# Altium PCB Power_Test.PcbDoc
Units mil, origin at the board's own origin, x right, y up, seen from the top; angles counter-clockwise.
Board outline 2960 x 2470 mil, 4 copper layers (Top Layer 1, Top Layer, Bottom Layer, Bottom Layer 1), stack 23.756 mil thick; 37 components, 22 nets, 174 pads, 476 vias.
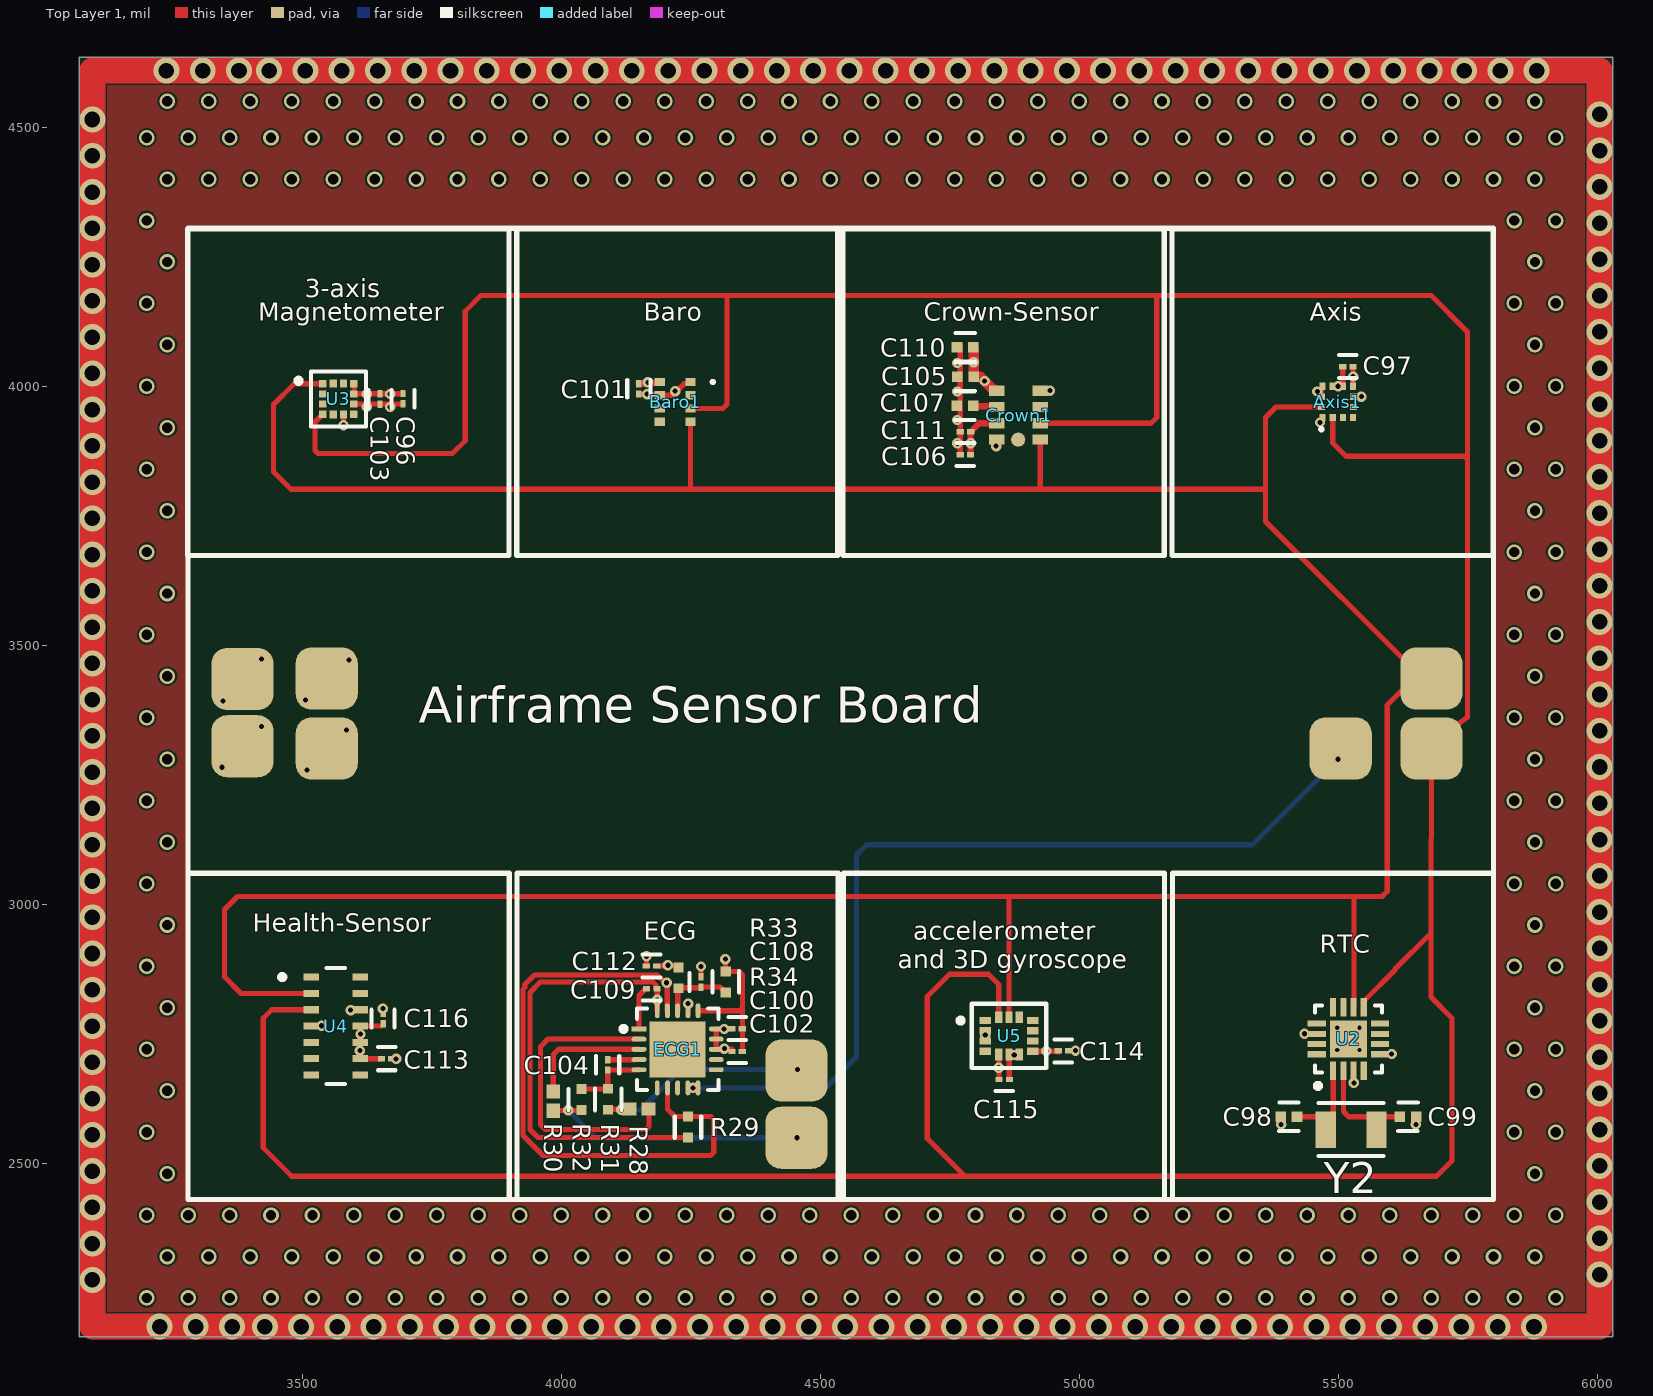
[diagram p0: Top Layer 1 view]
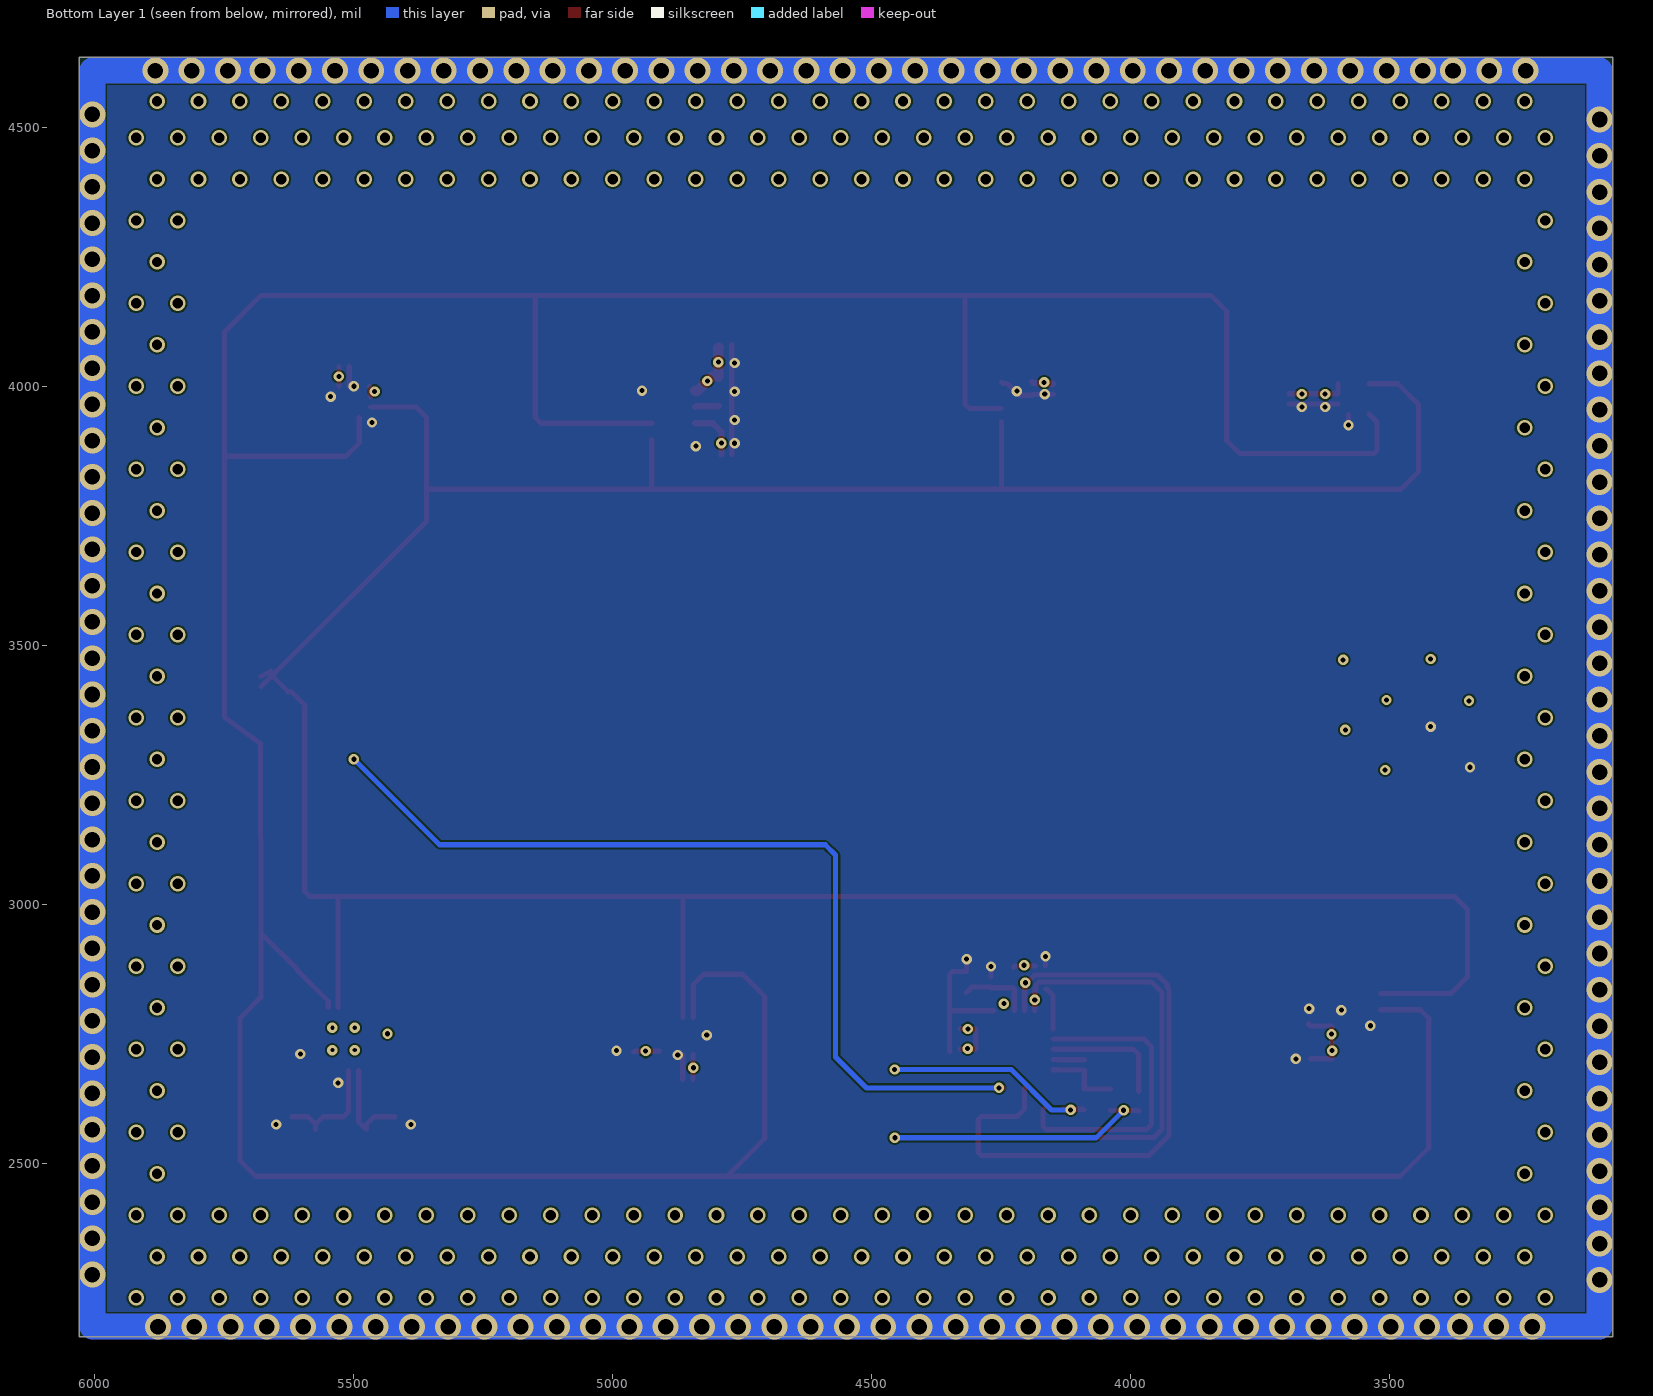
[diagram p1: Bottom Layer 1 view, seen from below]
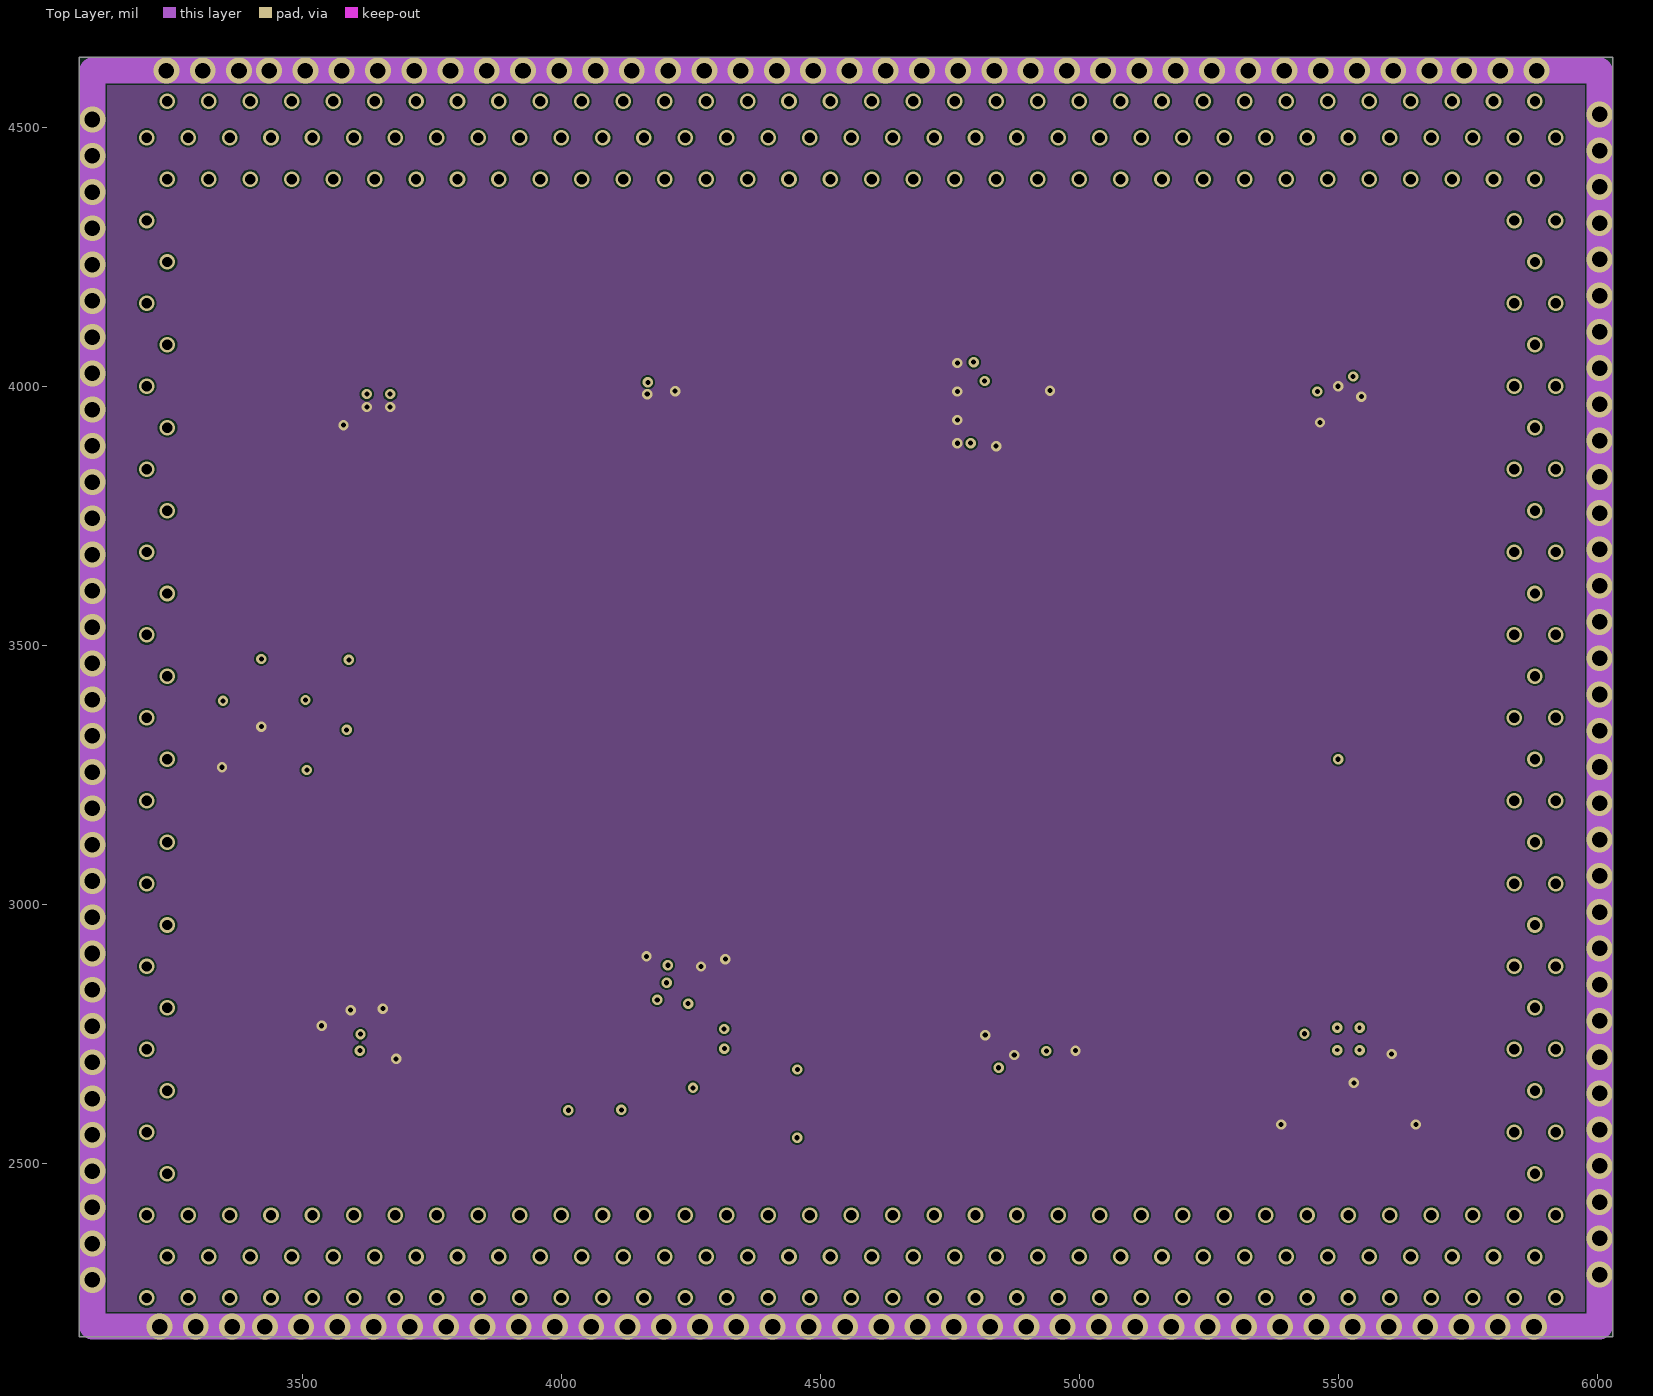
[diagram p2: Top Layer]
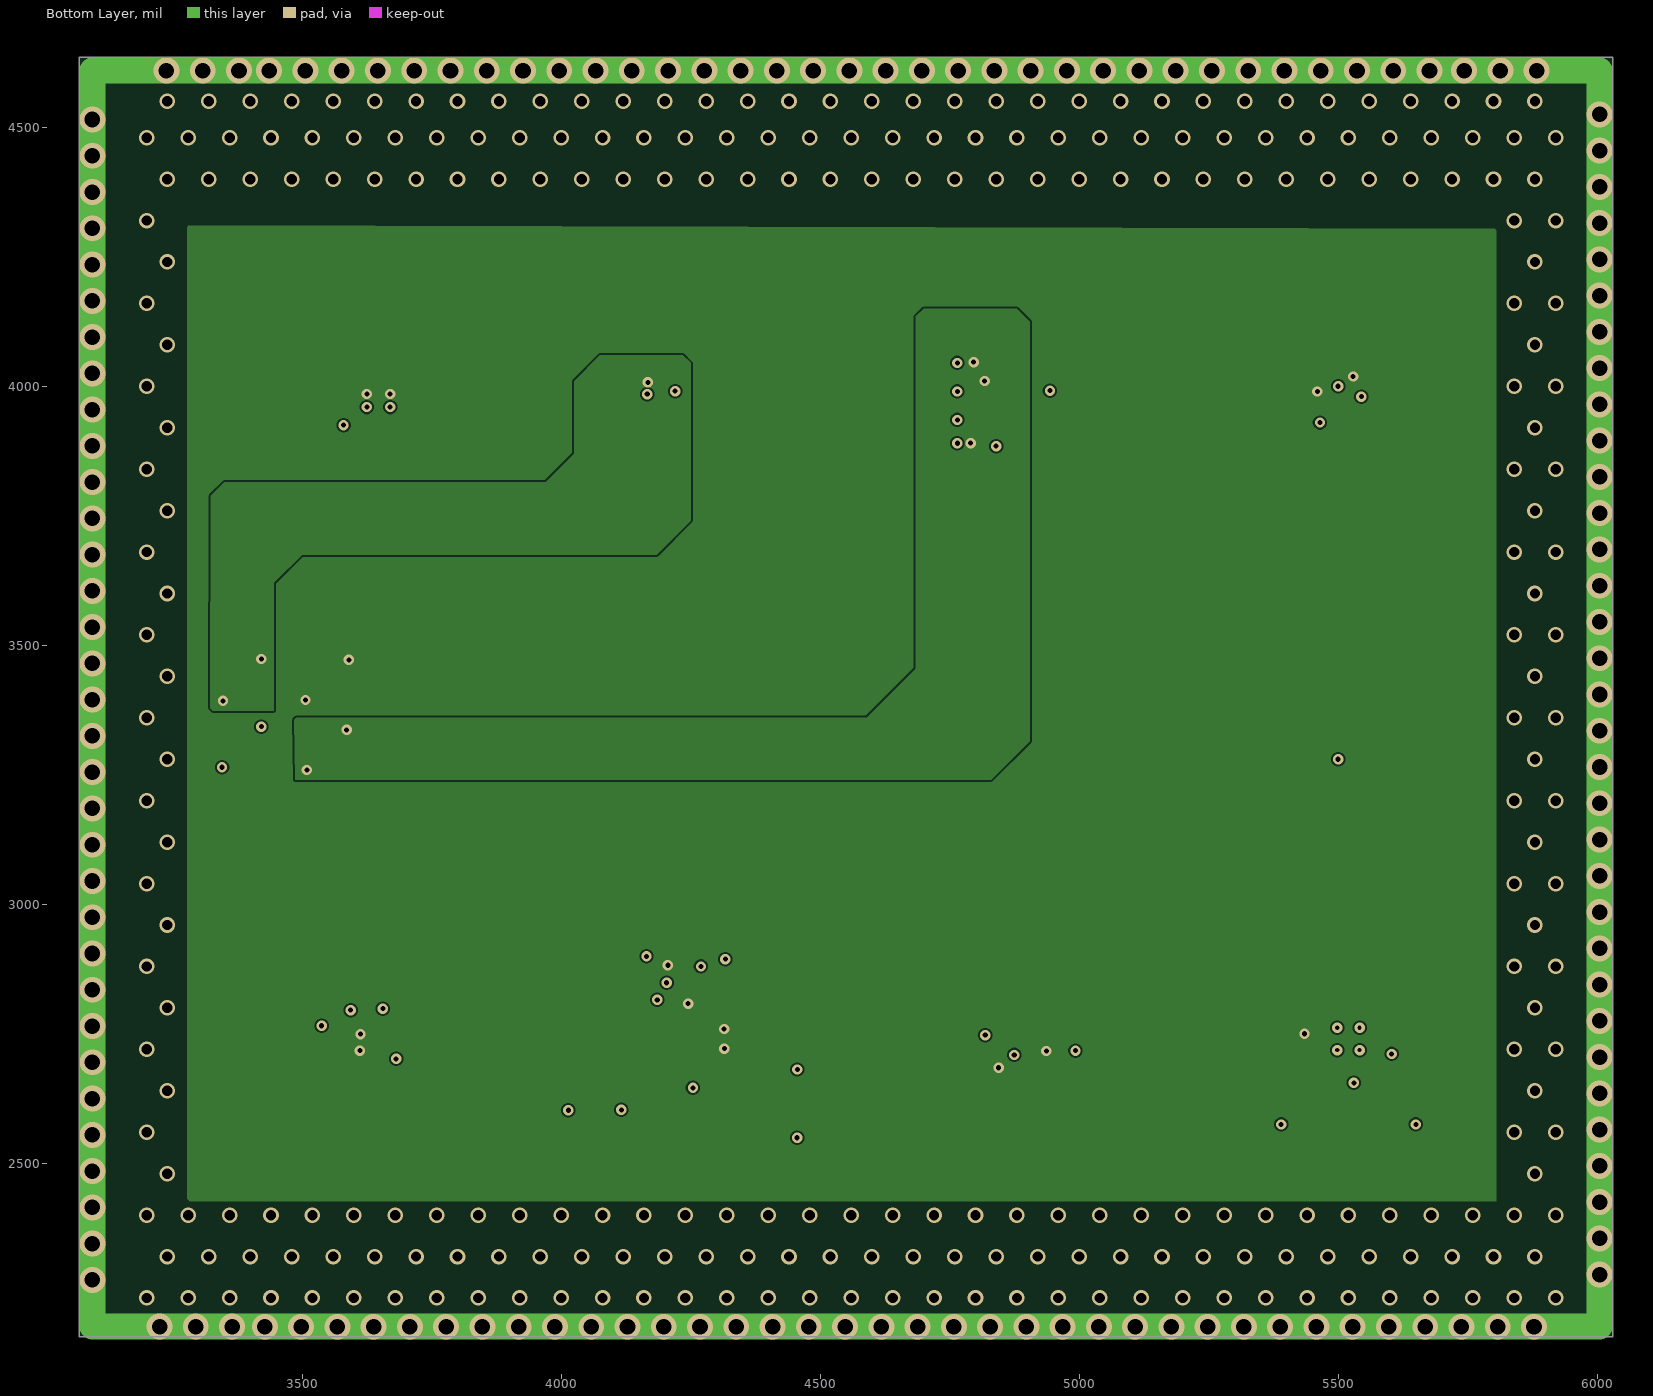
[diagram p3: Bottom Layer]
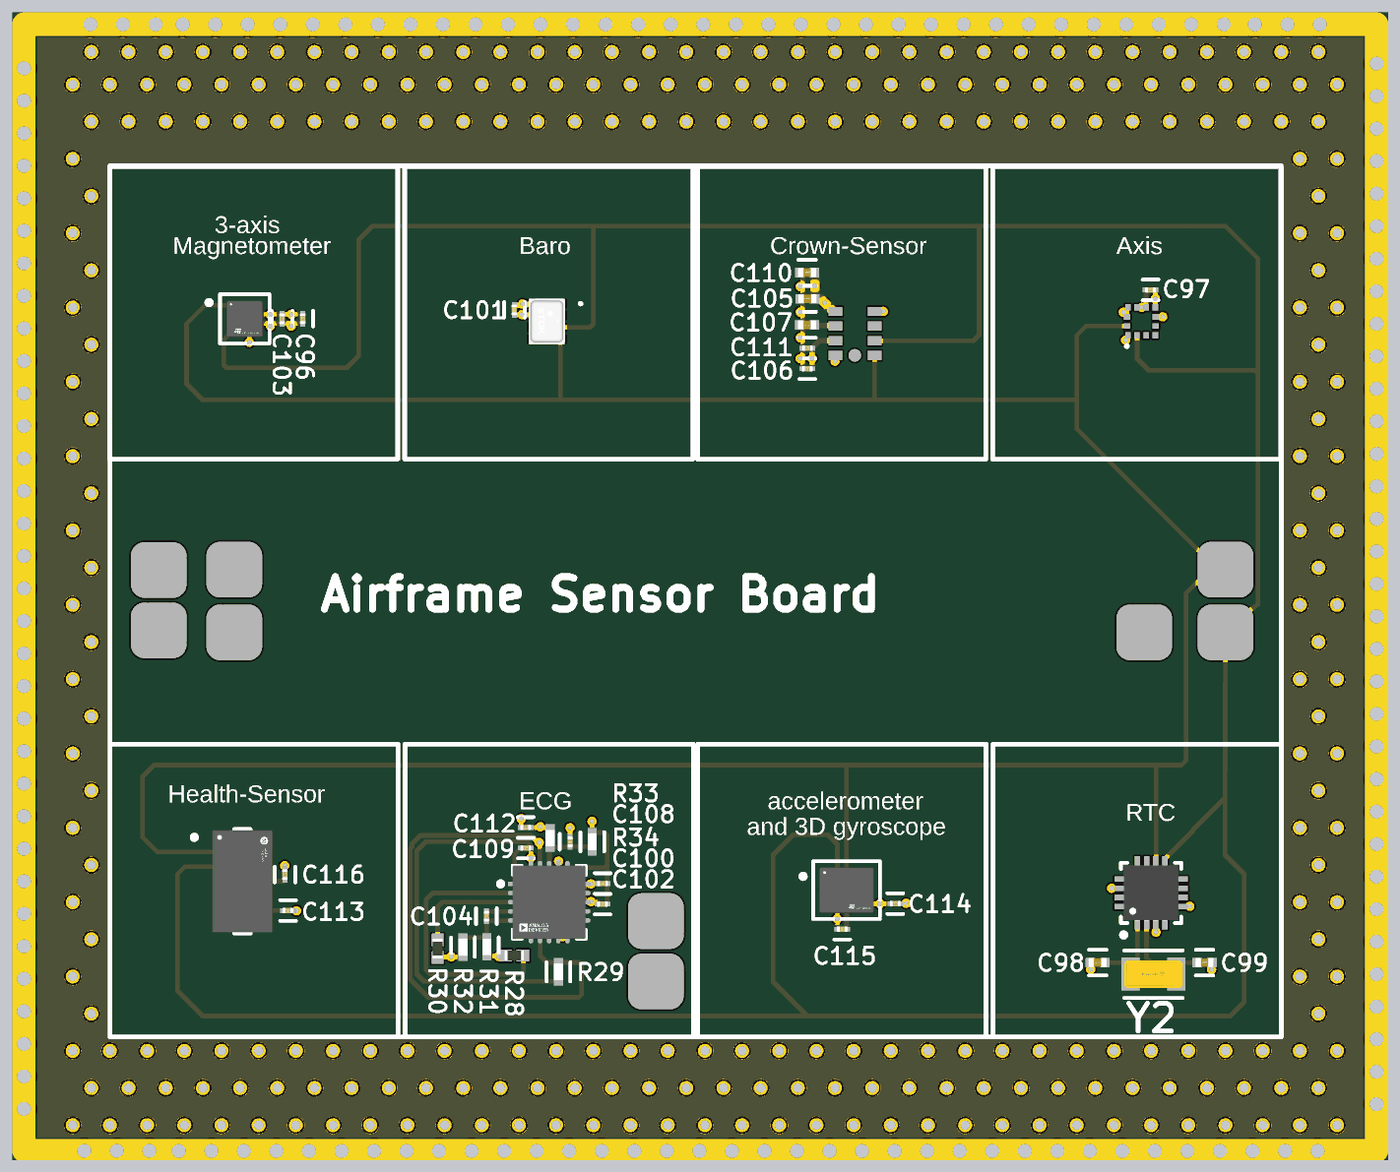
[diagram p4: 3D render of the assembled board from above, using the file's embedded part models]

## Layer stack, top to bottom
Top Solder: solder mask 0.4, Solder Resist, Dk 3.5
Top Layer 1: signal copper 1.378
Dielectric 2: prepreg 2.8, PP-006, Dk 4.1
Top Layer: signal copper 1.4
Dielectric 1: dielectric 12.6, FR-4, Dk 4.8
Bottom Layer: signal copper 1.4
Dielectric 3: prepreg 2.8, PP-006, Dk 4.1
Bottom Layer 1: signal copper 1.378
Bottom Solder: solder mask 0.4, Solder Resist, Dk 3.5

## Board outline
3070,2165 3070,4635 6030,4635 6030,2165

## Design rules (kind name [scope] priority, off if disabled: settings)
Clearance [All] p1: gap=3.5 ignorepadtopadclearanceinfootprint=FALSE
PlaneConnect [All] p1: planeconnectstyle=Direct reliefexpansion=20 reliefentries=4 reliefconductorwidth=10 reliefairgap=10
PolygonConnect [All] p1: connectstyle=Direct reliefconductorwidth=10 reliefentries=4 polygonreliefangle="90 Angle" airgapwidth=10
RoomDefinition 7_Airframe-Sensors [InComponentClass('7_Airframe-Sensors')] p1: confinementstyle=ConfineIn formatcopy=TRUE lockcomponents=FALSE outline 0,0 2000,0 2000,1000 0,1000
RoutingVias [All] p1: holewidth=9.84 width=19.68 viastyle="Through Hole" minholewidth=7.87 minwidth=15.75 maxholewidth=28 maxwidth=50
SolderMaskExpansion [All] p1: expansion=4 istentingtop=FALSE
Width [All] p1: maxlimit=100 minlimit=3.5 preferedwidth=10
29 further rules are at their usual default settings.

## Components (designator, comment, footprint, x,y, rotation, side; value= is the part's Value field where it differs from the comment)
Axis1 "KXTJ3-1057" 2X2X0.9MMLGA 5499.53,3969.98 r90 top
Baro1 "ICP-10111" ICP10111 4220,3970 r0 top
C96 "0.22uF 0201" FP-C0603-030-0_03-IPC_C 3694.77,3976 r270 top
C97 "0.22uF 0201" FP-C0603-030-0_03-IPC_C 5518.71,4037.96 r180 top
C98 "8pF 0402" FP-C0402C225M9PACTU-MFG 5405,2590 r180 top
C99 "8pF 0402" FP-C0402C225M9PACTU-MFG 5635,2590 r0 top
C100 "0.22uF 0201" FP-C0603-030-0_03-IPC_C 4340,2760 r0 top
C101 "0.22uF 0201" FP-C0603-030-0_03-IPC_C 4150,3995 r270 top
C102 "0.22uF 0201" FP-C0603-030-0_03-IPC_C 4339.83,2715.87 r0 top
C103 "0.22uF 0201" FP-C0603-030-0_03-IPC_C 3650.34,3975.54 r270 top
C104 "1nF 0201" FP-C0603-030-0_03-IPC_C 4090,2690 r90 top
C105 "10uF 0402" FP-C0402C225M9PACTU-MFG 4780.56,4018.73 r0 top
C106 "0.1uF 0201" FP-C0603-030-0_03-IPC_C 4780.46,3868.14 r180 top
C107 "4.7uF 0402" FP-C0402C225M9PACTU-MFG 4779.55,3962.62 r180 top
C108 "100nF 0201" FP-C0603-030-0_03-IPC_C 4270,2850 r90 top
C109 "0.22uF 0201" FP-C0603-030-0_03-IPC_C 4174.94,2836.61 r0 top
C110 "10uF 0402" FP-C0402C225M9PACTU-MFG 4780,4075 r0 top
C111 "0.1uF 0201" FP-C0603-030-0_03-IPC_C 4780.73,3912.45 r180 top
C112 "100nF 0201" FP-C0603-030-0_03-IPC_C 4174.53,2880.74 r180 top
C113 "0.22uF 0201" FP-C0603-030-0_03-IPC_C 3663.24,2701.92 r0 top
C114 "0.22uF 0201" FP-C0603-030-0_03-IPC_C 4969.57,2717 r0 top
C115 "0.22uF 0201" FP-C0603-030-0_03-IPC_C 4855.5,2661.89 r0 top
C116 "0.22uF 0201" FP-C0603-030-0_03-IPC_C 3656.52,2779.41 r90 top
Crown1 "PAT9125KS" PAT9125KS-Footprint-1 4841.14,3897.01 r0 top
ECG1 "AD8232ACPZ-R7" FP-CP-20-8-IPC_C 4225,2720 r0 top
R28 "RC0402FR-07180KL" RESC1005X40X25ML05T10 4150,2605 r0 top
R29 "CR0402-JW-105GLF" FP-CR0402-MFG 4245,2570 r270 top
R30 "RC0402FR-07180KL" RESC1005X40X25ML05T10 3985,2620 r90 top
R31 "CR0402-JW-105GLF" FP-CR0402-MFG 4090.69,2623.71 r270 top
R32 "CR0402-JW-105GLF" FP-CR0402-MFG 4039.57,2623.11 r270 top
R33 "CR0402-JW-105GLF" FP-CR0402-MFG 4226.91,2857.91 r270 top
R34 "CR0402-JW-105GLF" FP-CR0402-MFG 4317.76,2850 r270 top
U2 "M41T62Q6F" STM-QFN-16_V 5520,2740 r90 top
U3 "LIS2MDLTR" FP-LGA-12-DM00170568-MFG 3569.98,3975.47 r0 top
U4 "MAX30101EFD+" FP-F143A5-1-MFG 3565,2765 r0 top
U5 "LSM6DSLTR" FP-LGA-14L-DM00249496-MFG 4864.69,2745.93 r0 top
Y2 "ABS07-120-32.768KHZ-T" FP-ABS07-120-MFG 5525,2565 r180 top

## Footprints (in the part's own frame and the unit in brackets; to place one, negate y for a bottom-side part, rotate by r counter-clockwise, add the part's x,y. Pads: shape width x height; smd on the part's side, far side on the other; paste and mask are expansions set on the pad)
2X2X0.9MMLGA [mm]
  rect 0.35x0.3 smd: 1(-0.763,0.75) 2(-0.763,0.25) 3(-0.763,-0.25) 4(-0.763,-0.75) 7(0.763,-0.75) 8(0.763,-0.25) 9(0.763,0.25) 10(0.763,0.75)
  rect 0.3x0.35 smd: 5(-0.25,-0.775) 6(0.25,-0.775) 11(0.25,0.8) 12(-0.25,0.8)
  silkscreen extent -1.4,0.75 -1.29,0.86
FP-ABS07-120-MFG [mm]
  rect 1x1.8 smd paste+0 mask+0: 1(-1.25,0) 2(1.25,0)
  silkscreen extent -1.6,-1.3 1.6,1.3, body extent -1.85,-1 1.85,1, height 0.25
FP-C0402C225M9PACTU-MFG [mm]
  rect 0.52x0.52 smd paste+0 mask+0: 1(-0.4,0) 2(0.4,0)
  silkscreen extent -0.48,-0.7 0.48,0.7, body extent -0.8,-0.4 0.8,0.4, height 0.25
FP-C0603-030-0_03-IPC_C [mil]
  rect 14.03x10.34 smd paste+0 mask+0: 1(-9.97,0) 2(9.97,0)
  silkscreen extent -17,-22 17,22, body extent -21,-10 21,10, height 10
FP-CP-20-8-IPC_C [mm]
  rect 0.731x0.239 smd paste+0 mask+0: 1(-1.891,1)
  rrect100% 0.731x0.239 smd paste+0 mask+0: 2(-1.891,0.5) 3(-1.891,0) 4(-1.891,-0.5) 5(-1.891,-1) 11(1.891,-1) 12(1.891,-0.5) 13(1.891,0) 14(1.891,0.5) 15(1.891,1)
  rrect100% 0.239x0.731 smd paste+0 mask+0: 6(-1,-1.891) 7(-0.5,-1.891) 8(0,-1.891) 9(0.5,-1.891) 10(1,-1.891) 16(1,1.891) 17(0.5,1.891) 18(0,1.891) 19(-0.5,1.891) 20(-1,1.891)
  rect 2.75x2.75 smd paste-1000 mask+0: 21(0,0)
  silkscreen extent -2.78,-2 2,2, body extent -2.36,-2.36 2.36,2.36, height 0.25
FP-CR0402-MFG [mm]
  rect 0.475x0.5 smd paste+0 mask+0: 1(-0.512,0) 2(0.513,0)
  silkscreen extent -0.53,-0.65 0.53,0.65, body extent -0.85,-0.38 0.85,0.38, height 0.25
FP-F143A5-1-MFG [mm]
  rect 0.75x0.35 smd paste+0 mask+0: 1(-1.2,2.4) 2(-1.2,1.6) 3(-1.2,0.8) 4(-1.2,0) 5(-1.2,-0.8) 6(-1.2,-1.6) 7(-1.2,-2.4) 8(1.2,-2.4) 9(1.2,-1.6) 10(1.2,-0.8) 11(1.2,0) 12(1.2,0.8) 13(1.2,1.6) 14(1.2,2.4)
  silkscreen extent -2.75,-2.85 0.45,2.85, body extent -2.2,-3.35 2.2,3.35, height 0.25
FP-LGA-12-DM00170568-MFG [mm]
  rect 0.375x0.35 smd paste+0 mask+0: 1(-0.763,0.75) 2(-0.763,0.25) 3(-0.763,-0.25) 4(-0.763,-0.75) 7(0.763,-0.75) 8(0.763,-0.25) 9(0.763,0.25) 10(0.763,0.75)
  rect 0.35x0.375 smd paste+0 mask+0: 5(-0.25,-0.763) 6(0.25,-0.763) 11(0.25,0.763) 12(-0.25,0.763)
  silkscreen extent -2.07,-1.35 1.35,1.35, body extent -1.55,-1.55 1.55,1.55, height 0.25
FP-LGA-14L-DM00249496-MFG [mm]
  rect 0.575x0.35 smd paste+0 mask+0: 1(-1.162,0.75) 2(-1.162,0.25) 3(-1.162,-0.25) 4(-1.162,-0.75) 8(1.162,-0.75) 9(1.162,-0.25) 10(1.162,0.25) 11(1.162,0.75)
  rect 0.35x0.575 smd paste+0 mask+0: 5(-0.5,-0.913) 6(0,-0.913) 7(0.5,-0.913) 12(0.5,0.913) 13(0,0.913) 14(-0.5,0.913)
  silkscreen extent -2.5,-1.58 1.83,1.58, body extent -2.05,-1.8 2.05,1.8, height 0.25
ICP10111 [mm]
  rect 0.5x0.4 smd: 1(0.75,0.975) 2(0.75,0.325) 3(0.75,-0.325) 4(0.75,-0.975) 5(-0.75,-0.975) 6(-0.75,-0.325) 7(-0.75,0.325) 8(-0.75,0.975)
  silkscreen extent 1.8,0.93 1.9,1.02, body extent -1,-1.25 1,1.25, height 0.92
PAT9125KS-Footprint-1 [mm]
  round 0.69 smd: 3(1.05,0)
  rect 0.75x0.5 smd: MOTION(2.13,1.6) NCS/ID_SEL(2.13,2.4) SCLK/SCL(2.13,0) SDIO/SDA(2.13,0.8) VDD(0,0.8) VDDA(0,1.6) VLD(0,2.4) VSS(0,0)
RESC1005X40X25ML05T10 [mm] "Chip Resistor, 2-Leads, Body 1.05x0.55mm, IPC Low Density"
  rect 0.7x0.65 smd: 1(-0.475,0) 2(0.475,0)
  body extent -0.53,-0.28 0.53,0.28, height 0.4
STM-QFN-16_V [mm] "QFN, 16-Leads, Body 3x3mm, Pitch 0.5mm, Thermal Pad 1.8x1.8mm"
  rect 0.9x0.3 smd: 1(-1.55,0.75) 2(-1.55,0.25) 3(-1.55,-0.25) 4(-1.55,-0.75) 9(1.55,-0.75) 10(1.55,-0.25) 11(1.55,0.25) 12(1.55,0.75)
  rect 0.3x0.9 smd: 5(-0.75,-1.55) 6(-0.25,-1.55) 7(0.25,-1.55) 8(0.75,-1.55) 13(0.75,1.55) 14(0.25,1.55) 15(-0.25,1.55) 16(-0.75,1.55)
  rect 1.8x1.8 smd: 17(0,0)
  silkscreen extent -2.42,-1.65 1.65,1.65, body extent -1.5,-1.5 1.5,1.5, height 1

## Part data
Axis1: "Accelerometer", Manufacturer_Name=Kionix, Mouser Part Number=912-KXTJ3-1057, Datasheet Link="http://www.mouser.com/ds/2/348/KXTJ3-1057 Specifications Rev 2.0-1074602.pdf", Manufacturer_Part_Number=KXTJ3-1057, Mouser Price/Stock=https://www.mouser.co.uk/ProductDetail/Kionix/KXTJ3-1057?qs=hicmRmzGcNR8WipH%252BLEjqg%3D%3D
Baro1: "Undefined or Miscellaneous", Manufacturer_Name=TDK, Mouser Part Number=410-ICP-10111, Arrow Part Number=ICP-10111, Arrow Price/Stock=https://www.arrow.com/en/products/icp-10111/invensense, Datasheet Link=https://product.tdk.com/system/files/dam/doc/product/sensor/pressure/capacitive-pressure/data_sheet/ds-000186-icp-101xx.pdf, Height=1mm, Manufacturer_Part_Number=ICP-10111, Mouser Price/Stock=https://www.mouser.co.uk/ProductDetail/TDK-InvenSense/ICP-10111?qs=%252BEew9%252B0nqrBWGDChI3rokg%3D%3D
C96 C97 C100 C101 C102 C103 C104 C106 C108 C109 C111 C112 C113 C114 C115 C116: library part CMP-08246-007095-1, "Multilayer Ceramic Capacitors 220nF ±10% 6.3V X6S SMD 0201", Capacitance=220nF, Case Code (Imperial)=0201, Case Code (Metric)=0603, Dielectric=X6S, Dielectric Material=Ceramic, Max Operating Temperature=105°C, Min Operating Temperature=-55°C, Package Quantity=1, Tolerance=10%, Voltage Rating=6.3V, Case/Package=0201, Construction=Flat, Depth=0.3mm, Height=0.3mm, Lead Free="Lead Free", Length=0.6mm, Mount="Surface Mount", Packaging="Cut Tape", REACH SVHC="No SVHC", Resistor Type=Ceramic, RoHS Compliant=Yes, Series=C, Termination=SMD/SMT, Thickness=300um, Voltage Rating (DC)=6.3V, Weight=6E-06oz, Width=0.012inch
C98 C99 C105 C107 C110: library part CMP-2008-02064-3, "CAP CER 2.2UF 6.3V X5R 0402", Capacitance=2.2uF, Case Code (Imperial)=0402, Case Code (Metric)=1005, Dielectric=X5R, Dielectric Material=Ceramic, Max Operating Temperature=85°C, Min Operating Temperature=-55°C, Package Quantity=1, Tolerance=20%, Voltage=6.3V, Case/Package=0402, Construction=Flat, Contact Plating=Tin, Depth=0.5mm, Dissipation Factor=5%, Height=0.5mm, Lead Free="Lead Free", Length=1mm, Mount="Surface Mount", Number of Pins=2, Packaging="Tape and Reel", Radiation Hardening=No, REACH SVHC="No SVHC", RoHS Compliant=Yes, Series=C, Termination=SMD/SMT, Thickness=0.022inch, Voltage Rating=6.3V, Voltage Rating (DC)=6.3V, Width=0.5mm
Crown1: library part CMP-00000-2
ECG1: library part CMP-09085-000003-1, "IC ECG FRONT END 20LFCSP", Case/Package="LFCSP EP", Input Bias Current=50pA, Input Offset Voltage (Vos)=3mV, Max Operating Temperature=85°C, Max Supply Voltage=3.5V, Min Operating Temperature=-40°C, Min Supply Voltage=2V, Nominal Supply Current=170uA, Package Quantity=1500, Power Supply Rejection Ratio (PSRR)=90dB, Common Mode Rejection Ratio=80dB, Contact Plating=Tin, Lead Free="Contains Lead", Mount="Surface Mount", Number of Pins=20, Operating Supply Current=170uA, Packaging="Tape and Reel", REACH SVHC="No SVHC"
R28 R30: library part CMP-1011-00763-4, "Chip Resistor, 180 KOhm, +/- 1%, 62.5 mW, -55 to 155 degC, 0402 (1005 Metric), RoHS, Tape and Reel", Case Code (Imperial)=0402, Case Code (Metric)=1005, Manufacturer="Basic Passives", Max Operating Temperature="155 degC", Min Operating Temperature="-55 degC", Package Quantity=200, Power Rating="62.5 mW", Resistance="180 KOhm", Tolerance=1%, Voltage Rating="50 V", Case\/Package=0402, ComponentLink1Description="Manufacturer URL", ComponentLink1URL=http://www.yageo.com/, ComponentLink2Description=Datasheet, ComponentLink2URL=http://download.siliconexpert.com/pdfs/2016/1/13/0/45/27/830/yageo_/manual/8727809758379137pyu-rc_group_51_rohs_l___3.pdf, DatasheetVersion=12/2015, Height="0.35 mm", Length="1 mm", Mount="Surface Mount", Mounting Technology="Surface Mount", PackageDescription="2-Pin Surface Mount Device, Body 1 x 0.5 mm", PackageReference=0402, Packaging="Tape and Reel", PartNumber=RC0402FR-07180KL, Pins=2, REACH SVHC="No SVHC", RoHSCompliant=true, Width="0.5 mm"
R29 R31 R32: library part CMP-2002-05525-2, "Thick Film Chip Resistors 0402 1MΩ 0.0625W 5% 200ppm/°C", Case Code (Imperial)=0402, Case Code (Metric)=1005, Max Operating Temperature=125°C, Max Power Dissipation=63mW, Min Operating Temperature=-55°C, Package Quantity=10000, Power Rating=62.5mW, Resistance=1MR, Temperature Coefficient=200ppm/°C, Tolerance=5%, Voltage Rating=50V, Case/Package=0402, Composition="Thick Film", Contact Plating=Tin, Depth=0.5mm, Height=0.016inch, Length=1mm, Military Standard=Not, Mount="Surface Mount", Number of Terminations=2, Packaging="Tape and Reel", Radiation Hardening=No, Termination=SMD/SMT, Thickness=356um, Width=0.02inch
R33 R34: library part CMP-2002-05525-2, "Thick Film Chip Resistors 0402 10MΩ 0.0625W 5% 200ppm/°C", Case Code (Imperial)=0402, Case Code (Metric)=1005, Max Operating Temperature=125°C, Max Power Dissipation=63mW, Min Operating Temperature=-55°C, Package Quantity=10000, Power Rating=62.5mW, Resistance=1MR, Temperature Coefficient=200ppm/°C, Tolerance=5%, Voltage Rating=50V, Case/Package=0402, Composition="Thick Film", Contact Plating=Tin, Depth=0.5mm, Height=0.016inch, Length=1mm, Military Standard=Not, Mount="Surface Mount", Number of Terminations=2, Packaging="Tape and Reel", Radiation Hardening=No, Termination=SMD/SMT, Thickness=356um, Width=0.02inch
U2: library part CMP-2000-06644-1, "Low-Power Serial Real-Time Clock (RTC) with Alarm, 1.3 to 4.4 V, -40 to 85 degC, 16-Pin QFN, RoHS, Tape and Reel", Clock Frequency=32.768kHz, Digital IC Case Style=QFN, Manufacturer=STMicroelectronics, Operating Temperature Max=85°C, Operating Temperature Min=-40°C, Operating Temperature Range=-40°Cto+85°C, Package Description="16-Pin Quad Flat No-lead Package, Body 3 x 3 mm, Pitch 0.5 mm, Thermal Pad 1.8 x1.8 mm", Package Reference=QFN-16, Supply Voltage Max=4.4V, Supply Voltage Min=1.3V, Supply Voltage Range=1.3Vto4.4V, Base Number=41, Clock Format=HH:MM:SS, Clock IC Type=RTC, Datasheet URL=http://www.st.com/content/ccc/resource/technical/document/datasheet/c8/66/38/71/c4/ac/49/9e/CD00019860.pdf/files/CD00019860.pdf/jcr:content/translations/en.CD00019860.pdf, Datasheet Version="Rev. 22, 10/2015", Date Format=Day, IC Case Style=QFN, IC Interface Type=I2C,Serial, Interface=Serial,I2C, Interface Type=I2C,Serial, Manufacturer URL=http://www.st.com/, Memory Configuration=16x8, Mounting Technology=SurfaceMount, No. of Outputs=2, No. of Pins=16, Package / Case=QFN, RTC Features=Square-WaveOutput, SVHC=NoSVHC(19-Dec-2012), Termination Type=SMD, Type=RTC
U3: library part CMP-12173-000002-1, "SENSOR MR I2C/SPI 12LGA", Manufacturer=STMicroelectronics, Max Supply Voltage=3.6V, Min Supply Voltage=1.71V, Operating Supply Current=50-200uA, Package=LGA-12-DM00170568, Temperature="-40°C to +85°C", Temperature Range High=+85°C, Temperature Range Low=-40°C, Automotive=No, Category=IC, ComponentLink2Description=Datasheet, ComponentLink2URL=https://www.st.com/resource/en/datasheet/lis2mdl.pdf, Device Class L1=Sensors, Device Class L2="Magnetic Sensors", Device Class L3=unset, Digikey Description="SENSOR MR I2C/SPI 12LGA", Height=0.7mm, Lead Free=Yes, Manufacturer Part Number=LIS2MDLTR, Octopart=https://octopart.com/lis2mdltr-stmicroelectronics-81117311, RoHS=TRUE, Sensing Method=Magnetic, Sensor Output=I2C,SPI
U4: library part CMP-05738-000001-1, "INTEGRATED OPTICAL SENSOR", Manufacturer="Maxim Integrated", Max Junction Temp=+90°C, Max Supply Voltage=2V, Min Supply Voltage=1.7V, Operating Supply Current=600uA, Package=F143A5-1, Temperature="-40°C to +85°C", Temperature Range High=+85°C, Temperature Range Low=-40°C, Automotive=No, Category=IC, ComponentLink2Description=Datasheet, ComponentLink2URL=https://datasheets.maximintegrated.com/en/ds/MAX30101.pdf, Device Class L1=Sensors, Device Class L2=unset, Device Class L3=unset, Digikey Description="INTEGRATED OPTICAL SENSOR", Footprint Url=https://pdfserv.maximintegrated.com/land_patterns/90-0602.PDF, Height=1.65mm, Lead Free=Yes, Manufacturer Part Number=MAX30101EFD+, Mouser Description="INTEGRATED OPTICAL SENSOR", Octopart=https://octopart.com/max30101efd%2B-maxim+integrated-57054333, RoHS=TRUE, Sensor Output=I2C
U5: library part CMP-2000-07467-2, "IMU ACCEL/GYRO I2C/SPI 14LGA", Manufacturer=STMicroelectronics, Max Supply Voltage=3.6V, Min Supply Voltage=1.62V, Operating Supply Current=0.29-0.65mA, Package=LGA-14L-DM00249496, Temperature="-40°C to +85°C", Temperature Range High=+85°C, Temperature Range Low=-40°C, Accel Range=2/4/8/16g, Automotive=No, Category=IC, ComponentLink2Description=Datasheet, ComponentLink2URL=https://www.st.com/resource/en/datasheet/lsm6dsl.pdf, Device Class L1=Sensors, Device Class L2="Motion Sensors", Device Class L3="Inertial Measurement Units (IMUs)", Digikey Description="IMU ACCEL/GYRO I2C/SPI 14LGA", Footprint Url=https://www.st.com/resource/en/technical_note/cd00134799.pdf, Gyro Range=125/250/500/1000/2000°/s, Height=0.86mm, Lead Free=Yes, Manufacturer Part Number=LSM6DSLTR, Mouser Description="iNEMO inertial module: always-on 3D accelerometer and 3D gyroscope", Octopart=https://octopart.com/lsm6dsltr-stmicroelectronics-66358193, Resolution=16bits, RoHS=TRUE, Sensor Output=I2C,SPI, Sensor Type=Temperature,Accelerometer,Gyroscope
Y2: library part CMP-2000-07587-2, "CRYSTAL 32.7680KHZ 6PF SMD", Case/Package=SMD/SMT, ESR (Equivalent Series Resistance)=55kR, Frequency=32.768kHz, Frequency Tolerance=20ppm, Load Capacitance=6pF, Max Operating Temperature=85°C, Min Operating Temperature=-40°C, Operating Frequency="32.768 kHz", Package Quantity=3000, Series Resistance=60kR, Depth=1.5mm, Height=0.035inch, Lead Free="Lead Free", Length=3.2mm, Mount="Surface Mount", Number of Pins=2, Packaging="Tape and Reel", Radiation Hardening=No, REACH SVHC="No SVHC", RoHS Compliant=Yes, Series=ABS07, Termination=SMD/SMT, Tolerance=20ppm, Width=0.061inch

## Free pads (board coordinates)
  rrect50% 120x120 smd: 2(3385,3305) 2(3385,3435) 2(3547.55,3300.76) 2(3547.55,3435.76) 2(4454.54,2549.26) 2(4454.54,2679.26) 2(5505,3300.76) 2(5680,3300.76) 2(5680,3435.76)

## Via types
v1: diameter 30, hole 20, Top Layer 1 to Bottom Layer 1, 267 vias
v2: diameter 50, hole 30, Top Layer 1 to Bottom Layer 1, 144 vias
v3: diameter 20, hole 9.84, Top Layer 1 to Bottom Layer 1, 61 vias
v4: diameter 19.68, hole 7.87, Top Layer 1 to Bottom Layer 1, 4 vias

## Nets (pads, with @x,y where several pads share a name; then routed paths per layer and width w, separated by ;. In a path a pad name is that pad's centre, name@x,y a point inside that pad or via, vN(x,y) a via of type N, cw(c..) or ccw(c..) an arc to the next point about the centre after c; other vN are vias at no path point)
+1V8: Baro1.8 C101.1 pad.2@3385,3435 | length 41.9
  Top Layer 1 w12: C101.1 4174.83,4004.97 4176.37,4006.51 4188.6,4006.51 Baro1.8
  other v3: 3347.17,3392.6 3421.24,3473.64 4167.55,4007.46
+2V4: C105.2 C106.1 C110.2 C111.1 Crown1.VDD Crown1.VLD pad.2@3547.55,3300.76 | length 200.8
  Top Layer 1 w12: C106.1 4790.56,3868.28 4790.56,3912.32 C111.1 4790.88,3912.45 4806.93,3928.5 Crown1.VDD
  Top Layer 1 w20: C110.2 4796.31,4074.44 C105.2 ; 4809.54,4018.49 4836.54,3991.5 Crown1.VLD
  other v3: 3509.25,3259.28 3585.93,3336.83 4790.56,3890.3 4817.58,4010.21 4796.31,4046.58
+VS: Axis1.7 Axis1.10 Axis1.11 C96.1 C97.1 C100.1 C102.1 C103.1 C112.1 C113.1 C114.1 C115.1 C116.1 ECG1.13 ECG1.14 ECG1.15 ECG1.17 pad.2@3547.55,3435.76 R33.1 U2.14 U3.9 U3.10 U4.9 U4.10 U4.11 U5.5 U5.8 | length 568
  Top Layer 1 w10: U3.10 U3.9 3600.33,3985.64 3694.6,3985.64 3694.77,3985.82 C96.1 ; C113.1 3653.23,2701.96 3612.29,2701.96 U4.9 U4.10 U4.11 3653.92,2765 3656.52,2767.6 C116.1 ; C112.1 4184.67,2880.57 4224.42,2880.57 R33.1 ; C102.1@4329.86,2720 ECG1.13 ECG1.14 ECG1.15 4327.56,2759.37 4328.19,2760 C100.1 ; U5.5 4845.27,2709.73 4845.27,2662.06 4845.44,2661.89 C115.1 ; U5.8 4956.79,2716.4 4958.19,2715 C114.1@4960.03,2715 ; Axis1.11 5468.03,3997.05 5470,3999.02 Axis1.10 ; C97.1 5528.88,4037.96 5529.06,4037.78 Axis1.7
  other v3: 4844.65,2684.37 4936.76,2716.68 3611.41,2717.52 4315.07,2721.23 3612.72,2749.34 5435,2750 4314.65,2759.33 4245.21,2808.19 4206.08,2882.26 3506.63,3394.34 3590.29,3471.9 3625,3985 3670,3985 5460,3990 5529.06,4018.89
ECG-Out: ECG1.9 ECG1.10 pad.2@5505,3300.76 | length 1756.4
  Top Layer 1 w10: ECG1.9 v3(4254.53,2645.57) ECG1.10
  Bottom Layer 1 w10: v3(4254.53,2645.57) 4510.57,2645.57 4570,2705 4570,3095 4590,3115 5335,3115 v3(5500,3280)
GND: Axis1.1 Axis1.6 Axis1.8 Axis1.9 Baro1.1 Baro1.7 C96.2 C97.2 C98.2 C99.2 C100.2 C101.2 C102.2 C103.2 C105.1 C106.2 C107.2 C108.2 C110.1 C111.2 C112.2 C113.2 C114.2 C115.2 C116.2 Crown1.NCS/ID_SEL Crown1.VSS ECG1.16 pad.2@3385,3305 R34.1 U2.3 U2.5 U3.6 U3.8 U4.4 U4.12 U5.2 U5.3 U5.6 U5.7 | length 860.4
  Top Layer 1 w10: U3.6 3579.91,3945.36 3579.91,3925.09 v3(3580,3925) ; U3.8 3600.2,3965.83 3694.6,3965.83 C96.2 ; C101.2 4150,3984.09 4150.17,3983.91 4189.35,3983.91 Baro1.7 4215.31,3982.8 4238.03,4005.51 4246.65,4005.51 Baro1.1 ; C112.2 4164.71,2880.9 4164.71,2899.35 v3(4164.87,2899.51) ; ECG1.16 4344.14,2794.43 4350,2800.29 ; C108.2 v3(4270,2880) ; v3(4317.22,2894.1) 4317.49,2893.83 4317.49,2870.44 R34.1 4317.93,2870 4344.14,2870 4350,2864.14 4350,2800.29 ; C102.2 4350,2716.04 4350,2800.29 ; C110.1@4770.3,4080.24 4770.49,4080.05 C106.2 ; U5.6 4865.08,2709.61 4865.08,2662.06 4865.25,2661.89 C115.2 ; C97.2 5508.89,4037.96 5509.06,4037.78 5509.06,4000.31 Axis1.8
  other v3: 5390,2575 5650,2575 5530.55,2655.37 3681.55,2701.57 4874.73,2709.14 5603.25,2711.06 4992.99,2717.54 4818.88,2747.46 3537.82,2765.5 3593.79,2795.62 3655.98,2798.59 3345.43,3264.51 3421.24,3342.93 4839.84,3884.4 4765,3890 5465,3930 4765,3935 3625,3960 3670,3960 5545,3980 4166.26,3984.84 4765,3990 4220.1,3990.71 4943.79,3991.59 5500.08,4000.11 4765,4045
HPSENSE: C109.2 ECG1.20 R29.2 | length 882.5
  Top Layer 1 w10: ECG1.20 v3(4185.63,2815.44) 4185.63,2836.44 4185.46,2836.61 C109.2 4183.07,2836.61 4182.9,2836.78 4182.9,2844.43 4177.04,2850.28 3960.28,2850.28 3940,2830 3940,2565 3955.18,2549.82 R29.2
IMU_CS: U5.12
Motion_Inter: Crown1.MOTION
NetC98_1: C98.1 U2.1 Y2.2 | length 191.5
  Top Layer 1 w10: C98.1 5461.1,2590 5475.79,2575.31 Y2.2 5490.47,2579.69 U2.1
NetC99_1: C99.1 U2.2 Y2.1 | length 214.8
  Top Layer 1 w10: U2.2 5510.16,2599.84 5520,2590 5559.53,2590 Y2.1@5574.21,2575.31 ; Y2.1 Y2.1@5574.21,2575.31 ; C99.1 5588.9,2590 Y2.1@5574.21,2575.31
NetC104_1: C104.1 ECG1.5 R31.1 R32.1 | length 148.6
  Top Layer 1 w10: R32.1 4039.87,2643.58 4090.39,2643.58 R31.1 4090.17,2644.41 4090.17,2679.86 C104.1 4140.87,2680.03 4141.47,2680.63 ECG1.5
NetC104_2: C104.2 ECG1.4 | length 60.7
  Top Layer 1 w10: C104.2 4141.12,2699.97 4141.47,2700.31 ECG1.4
NetC107_1: C107.1 Crown1.VDDA | length 46.9
  Top Layer 1 w12: C107.1 4796.6,3961.31 4839.83,3961.31 Crown1.VDDA
NetC109_1: C109.1 ECG1.1 | length 84.3
  Top Layer 1 w10: ECG1.1 4150.57,2824.05 4163.13,2836.61 C109.1
NetECG1_2: ECG1.2 R28.2 | length 597.9
  Top Layer 1 w10: ECG1.2 3974.68,2739.68 3960,2725 3960,2575 3970,2565 4164.14,2565 4170,2570.86 4170,2603.7 R28.2
NetECG1_3: ECG1.3 R30.2 | length 241
  Top Layer 1 w10: R30.2 3985,2710 3995,2720 ECG1.3
OPAMP+: ECG1.7 ECG1.19 R29.1 | length 1224
  Top Layer 1 w10: ECG1.7 4205.6,2645.28 4205.6,2604.4 4219.82,2590.18 R29.1 ; ECG1.19 4205.03,2794.72 4205.03,2847.11 v3(4203.64,2848.5) 4200.93,2848.5 4185.65,2863.78 3948.78,2863.78 3930,2845 3930,2839.09 3926.5,2835.59 3926.5,2553.5 3965,2515 4288.97,2515 4294.82,2520.86 4294.82,2584.32 4288.97,2590.18 R29.1@4245.49,2590.18
Point1: pad.2@4454.54,2679.26 R28.1 R31.2 | length 413.4
  Top Layer 1 w10: R31.2 4091.43,2604.26 4130.56,2604.26 R28.1
  Bottom Layer 1 w10: v3(4116.29,2603.04) 4153.04,2603.04 4231.07,2681.07 v3(4456.1,2681.07)
Point2: pad.2@4454.54,2549.26 R30.1 R32.2 | length 518.8
  Top Layer 1 w10: R30.1 3985.82,2602.11 4038.76,2602.11 R32.2
  Bottom Layer 1 w10: v3(4013.98,2602.44) 4067.08,2549.34 v3(4455.56,2549.34)
REFIN: C108.1 ECG1.18 R33.2 R34.2 | length 140.7
  Top Layer 1 w10: ECG1.18 4225.29,2794.72 4225.29,2836.11 R33.2 4228.06,2838.88 4269.83,2838.88 4270,2839.05 C108.1 4307.05,2840.03 4317.26,2829.82 R34.2
SCL: Axis1.12 Baro1.4 Crown1.SCLK/SCL pad.2@5680,3435.76 U2.10 U3.1 U4.2 U5.13 | length 6661.2
  Top Layer 1 w10: U4.2 3382.01,2827.99 3350,2860 3350,2990 3375,3015 4864.68,3015 ; U3.1 3485,4005 3445,3965 3445,3835 3478.78,3801.22 4925,3801.22 ; 4249.53,3801.22 Baro1.4 ; U5.13 4864.69,3015 ; Crown1.SCLK/SCL 4925,3801.22 ; Axis1.12 5380.14,3960.14 5360,3940 5360,3801.22 ; U2.10 5530.75,2801.93 5530.75,3015 ; pad.2@5679.1,3420.16 pad.2@5654.63,3444.63 ; pad.2@5680,3440 5660,3450 pad.2@5654.63,3444.63 ; 4864.68,3015 5530.75,3015 ; 4925,3801.22 5360,3801.22 ; 5360,3801.22 5360,3739.26 pad.2@5654.63,3444.63 ; 5530.75,3015 5585,3015 5595,3025 5595,3385 5620.43,3410.43 5626.9,3410.43 5654.63,3438.16 pad.2@5654.63,3444.63
SDA: Axis1.2 Baro1.3 Crown1.SDIO/SDA pad.2@5680,3300.76 U2.9 U3.4 U4.3 U5.14 | length 8810.7
  Top Layer 1 w10: U4.3 3441.5,2796.5 3425,2780 3425,2530 3480,2475 4780,2475 ; U3.4 3539.47,3945.94 3537.58,3944.05 3537.58,3943.56 3525,3930.98 3525,3875.86 3530.86,3870 3790,3870 3815,3895 3815,4145 3845,4175 4320,4175 ; Baro1.3 4312.2,3957.2 4320,3965 4320,4175 ; U5.14 4845,2845 4825,2865 4750,2865 4706.93,2821.93 4706.93,2548.07 4780,2475 ; Crown1.SDIO/SDA 5138.5,3928.5 5150,3940 5150,4175 ; Axis1.2 5489.69,3890.31 5515,3865 5744.14,3865 5750,3859.14 ; U2.9 5549.53,2812.83 5610,2873.31 5610,2875 5679.1,2944.1 ; 4320,4175 5680,4175 5750,4105 5750,3859.14 ; 4780,2475 5690,2475 5720,2505 5720,2780 5679.1,2820.9 5679.1,2944.1 ; 5679.1,2944.1 5680,3310 5750,3361.06 5750,3859.14
pads on no net: Axis1.3 Axis1.4 Axis1.5 Baro1.2 Baro1.5 Baro1.6 Crown1.3 ECG1.6 ECG1.8 ECG1.11 ECG1.12 ECG1.21 U2.4 U2.6 U2.7 U2.8 U2.11 U2.12 U2.13 U2.15 U2.16 U2.17 U3.2 U3.3 U3.5 U3.7 U3.11 U3.12 U4.1 U4.5 U4.6 U4.7 U4.8 U4.13 U4.14 U5.1 U5.4 U5.9 U5.10 U5.11
copper on no net:
  other v1: 3200,2240 3280,2240 3360,2240 3440,2240 3520,2240 3600,2240 3680,2240 3760,2240 3840,2240 3920,2240 4000,2240 4080,2240 4160,2240 4240,2240 4320,2240 4400,2240 4480,2240 4560,2240 4640,2240 4720,2240 4800,2240 4880,2240 4960,2240 5040,2240 5120,2240 5200,2240 5280,2240 5360,2240 5440,2240 5520,2240 5600,2240 5680,2240 5760,2240 5840,2240 5920,2240 3240,2320 3320,2320 3400,2320 3480,2320 3560,2320 3640,2320 3720,2320 3800,2320 3880,2320 3960,2320 4040,2320 4120,2320 4200,2320 4280,2320 4360,2320 4440,2320 4520,2320 4600,2320 4680,2320 4760,2320 4840,2320 4920,2320 5000,2320 5080,2320 5160,2320 5240,2320 5320,2320 5400,2320 5480,2320 5560,2320 5640,2320 5720,2320 5800,2320 5880,2320 3200,2400 3280,2400 3360,2400 3440,2400 3520,2400 3600,2400 3680,2400 3760,2400 3840,2400 3920,2400 4000,2400 4080,2400 4160,2400 4240,2400 4320,2400 4400,2400 4480,2400 4560,2400 4640,2400 4720,2400 4800,2400 4880,2400 4960,2400 5040,2400 5120,2400 5200,2400 5280,2400 5360,2400 5440,2400 5520,2400 5600,2400 5680,2400 5760,2400 5840,2400 5920,2400 3240,2480 5880,2480 3200,2560 5840,2560 5920,2560 3240,2640 5880,2640 3200,2720 5840,2720 5920,2720 3240,2800 5880,2800 3200,2880 5840,2880 5920,2880 3240,2960 5880,2960 3200,3040 5840,3040 5920,3040 3240,3120 5880,3120 3200,3200 5840,3200 5920,3200 3240,3280 5880,3280 3200,3360 5840,3360 5920,3360 3240,3440 5880,3440 3200,3520 5840,3520 5920,3520 3240,3600 5880,3600 3200,3680 5840,3680 5920,3680 3240,3760 5880,3760 3200,3840 5840,3840 5920,3840 3240,3920 5880,3920 3200,4000 5840,4000 5920,4000 3240,4080 5880,4080 3200,4160 5840,4160 5920,4160 3240,4240 5880,4240 3200,4320 5840,4320 5920,4320 3240,4400 3320,4400 3400,4400 3480,4400 3560,4400 3640,4400 3720,4400 3800,4400 3880,4400 3960,4400 4040,4400 4120,4400 4200,4400 4280,4400 4360,4400 4440,4400 4520,4400 4600,4400 4680,4400 4760,4400 4840,4400 4920,4400 5000,4400 5080,4400 5160,4400 5240,4400 5320,4400 5400,4400 5480,4400 5560,4400 5640,4400 5720,4400 5800,4400 5880,4400 3200,4480 3280,4480 3360,4480 3440,4480 3520,4480 3600,4480 3680,4480 3760,4480 3840,4480 3920,4480 4000,4480 4080,4480 4160,4480 4240,4480 4320,4480 4400,4480 4480,4480 4560,4480 4640,4480 4720,4480 4800,4480 4880,4480 4960,4480 5040,4480 5120,4480 5200,4480 5280,4480 5360,4480 5440,4480 5520,4480 5600,4480 5680,4480 5760,4480 5840,4480 5920,4480 3240,4550 3320,4550 3400,4550 3480,4550 3560,4550 3640,4550 3720,4550 3800,4550 3880,4550 3960,4550 4040,4550 4120,4550 4200,4550 4280,4550 4360,4550 4440,4550 4520,4550 4600,4550 4680,4550 4760,4550 4840,4550 4920,4550 5000,4550 5080,4550 5160,4550 5240,4550 5320,4550 5400,4550 5480,4550 5560,4550 5640,4550 5720,4550 5800,4550 5880,4550
  other v2: 3428.16,2184.42 3498.16,2184.42 3568.16,2184.42 3638.16,2184.42 3708.16,2184.42 3778.16,2184.42 3848.16,2184.42 3918.16,2184.42 3988.16,2184.42 4058.16,2184.42 4128.16,2184.42 4198.16,2184.42 4268.16,2184.42 4338.16,2184.42 4408.16,2184.42 4478.16,2184.42 4548.16,2184.42 4618.16,2184.42 4688.16,2184.42 4758.16,2184.42 4828.16,2184.42 4898.16,2184.42 4968.16,2184.42 5038.16,2184.42 5108.16,2184.42 5178.16,2184.42 5248.16,2184.42 5318.16,2184.42 5388.16,2184.42 5458.16,2184.42 5528.16,2184.42 5598.16,2184.42 5668.16,2184.42 5738.16,2184.42 5808.16,2184.42 5878.16,2184.42 3224.76,2184.83 3294.76,2184.83 3364.76,2184.83 3095,2275 6005,2285 3095,2345 6005,2355 3095,2415 6005,2425 3095,2485 6005,2495 3095,2555 6005,2565 3095,2625 6005,2635 3095,2695 6005,2705 3095,2765 6005,2775 3095,2835 6005,2845 3095,2905 6005,2915 3095,2975 6005,2985 3095,3045 6005,3055 3095,3115 6005,3125 3095,3185 6005,3195 3095,3255 6005,3265 3095,3325 6005,3335 3095,3395 6005,3405 3095,3465 6005,3475 3095,3535 6005,3545 3095,3605 6005,3615 3095,3675 6005,3685 3095,3745 6005,3755 3095,3815 6005,3825 3095,3885 6005,3895 3095,3955 6005,3965 3095,4025 6005,4035 3095,4095 6005,4105 3095,4165 6005,4175 3095,4235 6005,4245 3095,4305 6005,4315 3095,4375 6005,4385 3095,4445 6005,4455 3095,4515 6005,4525 3238.16,4609.42 3308.16,4609.42 3378.16,4609.42 3436.45,4609.36 3506.45,4609.36 3576.45,4609.36 3646.45,4609.36 3716.45,4609.36 3786.45,4609.36 3856.45,4609.36 3926.45,4609.36 3996.45,4609.36 4066.45,4609.36 4136.45,4609.36 4206.45,4609.36 4276.45,4609.36 4346.45,4609.36 4416.45,4609.36 4486.45,4609.36 4556.45,4609.36 4626.45,4609.36 4696.45,4609.36 4766.45,4609.36 4836.45,4609.36 4906.45,4609.36 4976.45,4609.36 5046.45,4609.36 5116.45,4609.36 5186.45,4609.36 5256.45,4609.36 5326.45,4609.36 5396.45,4609.36 5466.45,4609.36 5536.45,4609.36 5606.45,4609.36 5676.45,4609.36 5743.16,4609.42 5813.16,4609.42 5883.16,4609.42
  other v4: 5498.35,2718.35 5541.65,2718.35 5498.35,2761.65 5541.65,2761.65

## Polygon pours and split planes (outlines as drawn)
GND on Top Layer "NONET_L01_P-001" (solid, pour order 0): 6005,4625 6005,2175 3095,2175 3095,4625
+VS on Bottom Layer "NONET_L01_P-001" (solid, pour order 114): 3277.97,4310.63 3277.97,2431.15 3282.8,2426.32 5804.89,2426.32 5804.89,4301.27 5802.23,4303.93
+2V4 on Bottom Layer "NONET_L01_P-001" (solid, pour order 113): 3486.84,3239.97 4829.97,3239.97 4905,3315 4905,4125 4880,4150 4700,4150 4685,4135 4685,3455 4590,3360 3485,3360
+1V8 on Bottom Layer "NONET_L01_P-001" (solid, pour order 112): 3322.98,3372.89 3323.73,3373.63 3445.41,3373.63 3445.41,3620.41 3500,3675 4185,3675 4250,3740 4250,4045 4235,4060 4075,4060 4025,4010 4025,3870 3970,3815 3350,3815 3323.73,3788.73
no net on Bottom Layer "NONET_L01_P-001" (solid, pour order 5): 3095,4610 3100,4605 5995,4605 5995,2205 6000,2200 5985,2185 3095,2185
GND on Bottom Layer 1 "NONET_L01_P-001" (solid, pour order 1): 6005,4620 6005,2195 3095,2195 3095,4620
GND on Top Layer 1 "NONET_L01_P-001" (solid, pour order 98): 3095,4610 6005,4610 6005,2185 3095,2185

## Other copper
Top Layer 1:
  pour cut-out: 3285,4340 5795,4340 5805,4330 5805,2460 3285,2460
Multi-Layer:
  lines w50: 3095,2185 6005,2185 6005,4610 3095,4610 3095,2185

## Silkscreen, mask and mechanical layers (free items; w line width, h text height)
Top Overlay:
  lines w10: 3280,2430 5800,2430 ; 3280,2430 3280,4305 5800,4305 5800,2430 ; 3280,2430 3900,2430 3900,3060 3280,3060 3280,2430 ; 5800,2430 5180,2430 5180,3060 5800,3060 5800,2430 ; 3279.23,3673.53 3899.23,3673.53 3899.23,4303.53 3279.23,4303.53 3279.23,3673.53 ; 3914.23,3673.53 4534.23,3673.53 4534.23,4303.53 3914.23,4303.53 3914.23,3673.53 ; 3915,2430 4535,2430 4535,3060 3915,3060 3915,2430 ; 4544.23,3673.53 5164.23,3673.53 5164.23,4303.53 4544.23,4303.53 4544.23,3673.53 ; 4545,2430 5165,2430 5165,3060 4545,3060 4545,2430 ; 5179.23,3673.53 5799.23,3673.53 5799.23,4303.53 5179.23,4303.53 5179.23,3673.53
  text "3-axis" at 3505,4160 h60
  text "Magnetometer" at 3415,4115 h60
  text "Baro" at 4160,4115 h60
  text "Crown-Sensor" at 4700,4115 h60
  text "Axis" at 5445,4115 h60
  text "Airframe Sensor Board" at 3725,3350 h70
  text "Health-Sensor" at 3405,2935 h60
  text "ECG" at 4160,2920 h60
  text "accelerometer" at 4680,2920 h60
  text "RTC" at 5465,2895 h60
  text "and 3D gyroscope" at 4650,2865 h60
Top Solder:
  lines w50: 3095,2185 6005,2185 6005,4610 3095,4610 3095,2185
Bottom Solder:
  lines w50: 3095,2185 6005,2185 6005,4610 3095,4610 3095,2185
Mechanical 1:
  lines w19.68: 3055.88,2242.63 3060.17,4565.01 cw(c3140,4565.01) 3140,4644.84 5994.36,4640.34 cw(c5994.36,4599.86) 6034.84,4599.86 6038.54,2184.16 cw(c6008.44,2184.16) 6008.44,2154.06 3150,2150.16 cw(c3150,2244.07) 3056.08,2244.07